# EAGLE board pyControl_breakout_1_2r1 (EAGLE 6.6.0)
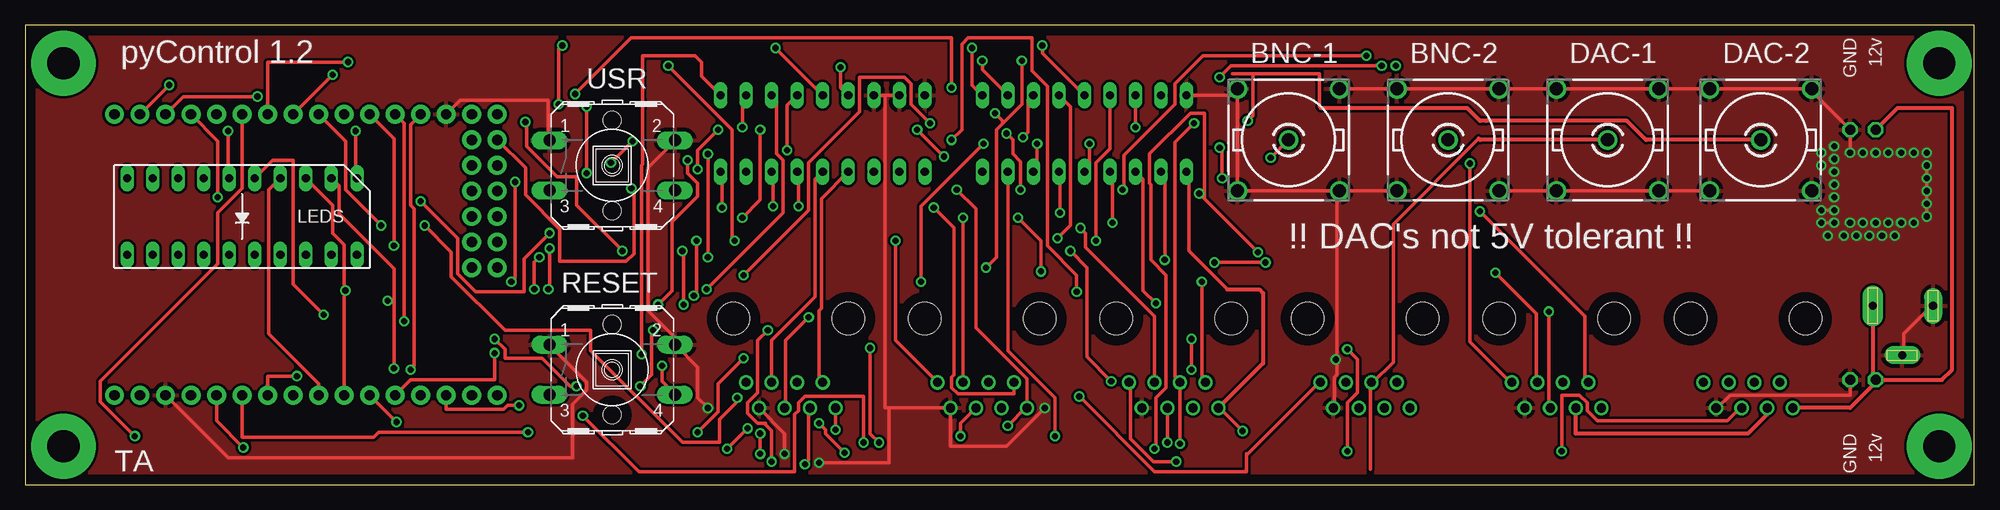
[diagram p0: board, top side]
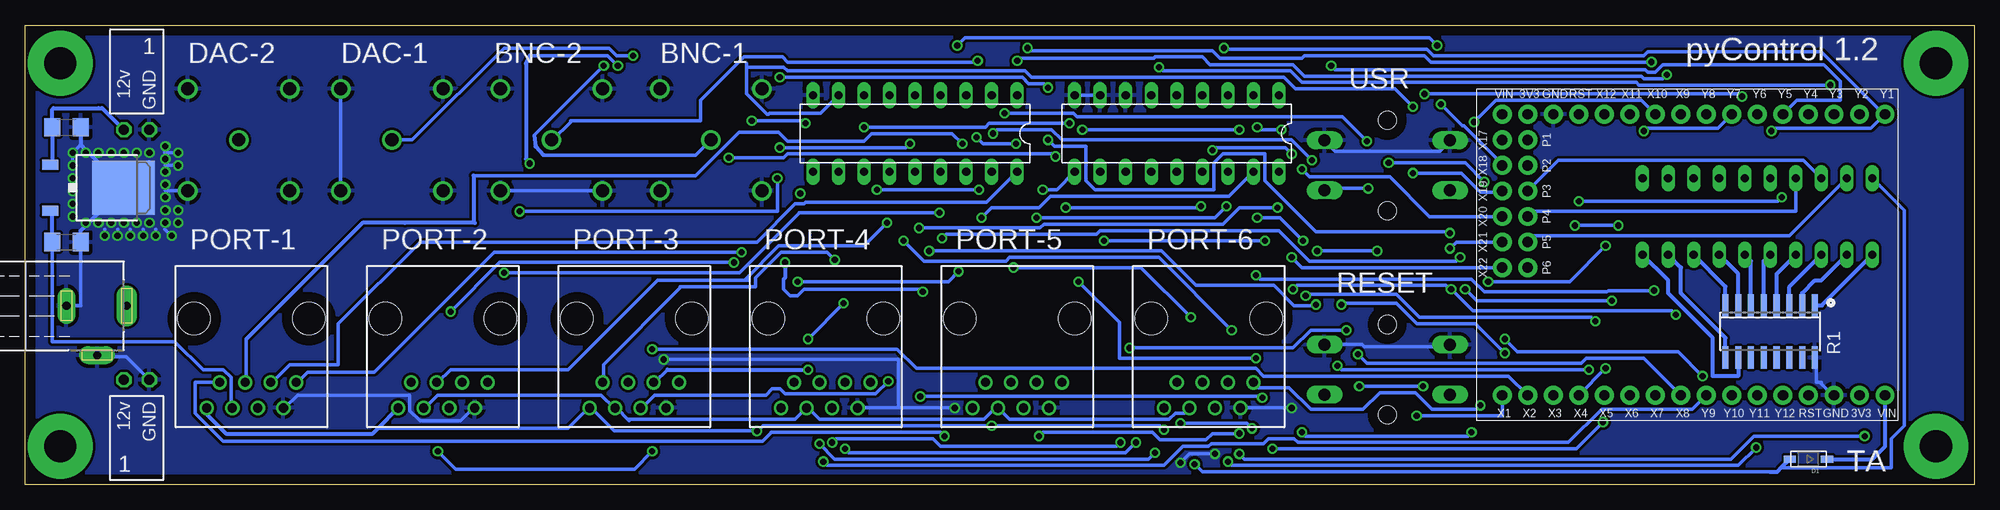
[diagram p1: board, bottom side, seen from below]

Size 193.98 x 45.71 mm. Coordinates in mm from the lower left corner, seen from the top.
Outline: 0,0 193.98,0 193.98,45.71 0,45.71 0,0
Copper layers (1*16): Top 0.035mm / dielectric 1.5mm / Bottom 0.035mm
Design rules "default *": minimum track width 14mil, minimum drill 24mil, track to track 10mil, track to pad 10mil, pad to pad 10mil, via to via 10mil, smd to smd 10mil, copper to edge 40mil, drill to drill 8mil, minimum pad ring 10mil, minimum via ring 8mil, stop-mask expansion 4mil, vias tented up to drill 0mil, thermal gap 15mil
vRestrict: area 125.7,22.9 to 177.8,26.7; area 8.9,1.3 to 12.7,3.8; area 53.3,18.4 to 64.1,21.6; area 71.1,22.9 to 82.6,26; area 90.2,22.9 to 101.6,26; area 109.2,22.9 to 120.7,26; area 121.3,41.3 to 130.8,44.5; area 137.2,41.3 to 147.3,44.5; area 153,41.3 to 162.6,44.5; area 168.3,41.3 to 177.8,44.5; area 55.2,38.7 to 62.2,41.9; area 8.9,40.6 to 29.2,45.1

## Footprints (pad centres in the part's own frame; a part is rotated, then mirrored left to right if it is on the bottom)
R141426 = drill 1.295: 1 0,0; 2 5.08,5.08; 3 -5.08,5.08; 4 -5.08,-5.08; 5 5.08,-5.08
C1206 = smd 1.6 x 1.8: 1 -1.4,0; 2 1.4,0
SOD-123 = smd 1.2 x 0.7: A 1.85,0; C -1.85,0
DIL18 = drill 0.813 long: 1 -10.16,-3.81; 2 -7.62,-3.81; 3 -5.08,-3.81; 4 -2.54,-3.81; 5 0,-3.81; 6 2.54,-3.81; 7 5.08,-3.81; 8 7.62,-3.81; 9 10.16,-3.81; 10 10.16,3.81; 11 7.62,3.81; 12 5.08,3.81; 13 2.54,3.81; 14 0,3.81; 15 -2.54,3.81; 16 -5.08,3.81; 17 -7.62,3.81; 18 -10.16,3.81
TO252 = smd 1 x 1.6: 1 -2.28,-4.8; 2 2.28,-4.8 | smd 5.4 x 6.2: 3 0,2.5
LED_BARGAPH_10 = drill 0.813 long: 1 -11.43,-3.81; 2 -8.89,-3.81; 3 -6.35,-3.81; 4 -3.81,-3.81; 5 -1.27,-3.81; 6 1.27,-3.81; 7 3.81,-3.81; 8 6.35,-3.81; 9 8.89,-3.81; 10 11.43,-3.81; 11 11.43,3.81; 12 8.89,3.81; 13 6.35,3.81; 14 3.81,3.81; 15 1.27,3.81; 16 -1.27,3.81; 17 -3.81,3.81; 18 -6.35,3.81; 19 -8.89,3.81; 20 -11.43,3.81
RJ45-NO-SHIELD-VERTICAL = drill 0.9 pad 1.4: 1 -4.445,5.08; 2 -3.175,7.62; 3 -1.905,5.08; 4 -0.635,7.62; 5 0.635,5.08; 6 1.905,7.62; 7 3.175,5.08; 8 4.445,7.62 | hole 3.251: -5.715,-1.27; 5.715,-1.27
SSW-102-02-S-S-RA = drill 1 pad 1.5 octagon: 1 -1.27,1.524; 2 1.27,1.524
NEB21R = drill 0.813 pad 2.032 long: 1 0,7.35 | drill 0.813 pad 1.778 long: 2 4.9,4.4; 3 0,1.35
PYBOARD-REDUCED-2 = drill 1.016 pad 1.88: 3V3_1 2.54,5.08; 3V3_2 30.48,38.1; GND_1 2.54,7.62; GND_6 30.48,35.56; P1 5.08,5.08; P2 7.62,5.08; P3 10.16,5.08; P4 12.7,5.08; P5 15.24,5.08; P6 17.78,5.08; RESET_1 2.54,10.16; RESET_2 30.48,33.02; VIN 2.54,2.54; VIN_5 30.48,40.64; X1 30.48,2.54; X2 30.48,5.08; X3 30.48,7.62; X4 30.48,10.16; X5 30.48,12.7; X6 30.48,15.24; X7 30.48,17.78; X8 30.48,20.32; X9 2.54,20.32; X10 2.54,17.78; X11 2.54,15.24; X12 2.54,12.7; X17 5.08,2.54; X18 7.62,2.54; X19 10.16,2.54; X20 12.7,2.54; X21 15.24,2.54; X22 17.78,2.54; Y1 2.54,40.64; Y2 2.54,38.1; Y3 2.54,35.56; Y4 2.54,33.02; Y5 2.54,30.48; Y6 2.54,27.94; Y7 2.54,25.4; Y8 2.54,22.86; Y9 30.48,22.86; Y10 30.48,25.4; Y11 30.48,27.94; Y12 30.48,30.48
SO16 = smd 0.6 x 2.2: 1 -4.445,-2.6; 2 -3.175,-2.6; 3 -1.905,-2.6; 4 -0.635,-2.6; 5 0.635,-2.6; 6 1.905,-2.6; 7 3.175,-2.6; 8 4.445,-2.6; 9 4.445,2.6; 10 3.175,2.6; 11 1.905,2.6; 12 0.635,2.6; 13 -0.635,2.6; 14 -1.905,2.6; 15 -3.175,2.6; 16 -4.445,2.6
B3F-40XX = drill 1.194 long: 1 -6.248,2.489; 2 6.248,2.489; 3 -6.248,-2.489; 4 6.248,-2.489 | hole 1.803: 0,-4.496; 0,4.496

## Placement (x,y rotation side)
BNC-1  R141426  [R141426]  125.73,34.29 0 top
BNC-2  R141426  [R141426]  141.6,34.29 0 top
C1  1uF  [C1206]  189.87,24.13 0 bottom
C2  1uF  [C1206]  189.87,35.56 0 bottom
D1  MBRA140  [SOD-123]  16.51,2.54 180 bottom
DAC-1  R141426  [R141426]  157.48,34.29 0 top
DAC-2  R141426  [R141426]  172.72,34.29 0 top
IC1  TBD62083APG  [DIL18]  105.41,34.92 180 bottom
IC2  TBD62083APG  [DIL18]  79.38,34.92 180 bottom
IC3  7805DT  [TO252]  186.69,29.53 270 bottom
LEDS  [LED_BARGAPH_10]  21.59,26.67 180 top
PORT-1  [RJ45-NO-SHIELD-VERTICAL]  171.45,15.24 180 bottom
PORT-2  [RJ45-NO-SHIELD-VERTICAL]  152.4,15.24 180 bottom
PORT-3  [RJ45-NO-SHIELD-VERTICAL]  133.35,15.24 180 bottom
PORT-4  [RJ45-NO-SHIELD-VERTICAL]  114.3,15.24 180 bottom
PORT-5  [RJ45-NO-SHIELD-VERTICAL]  95.25,15.24 180 bottom
PORT-6  [RJ45-NO-SHIELD-VERTICAL]  76.2,15.24 180 bottom
POW_BUS_1  SSW-102-02-S-S-RA  [SSW-102-02-S-S-RA]  182.88,36.83 180 bottom
POW_BUS_2  SSW-102-02-S-S-RA  [SSW-102-02-S-S-RA]  182.88,8.89 0 bottom
POW_CON  NEB21R  [NEB21R]  191.22,17.78 270 bottom
PYBOARD  PYBOARD-REDUCED-2  [PYBOARD-REDUCED-2]  49.53,39.37 270 bottom
R1  220R  [SO16]  20.32,15.24 180 bottom
RESET  [B3F-40XX]  58.42,11.43 0 top
USR  [B3F-40XX]  58.42,31.75 0 top

## Library data of the parts
BNC-1 BNC-2 DAC-1 DAC-2 = con-coax; MF: FARNELL; MPN: R141426161; OC_FARNELL: 4195115; OC_NEWARK: 14J7919
C1 C2 = resistor
D1 = adafruit
IC1 IC2 = uln-udn
IC3 = linear
LEDS = SparkFun-LED
PORT-1-PORT-6 = con-tycoelectronics-vertical_RJ45
POW_BUS_1 POW_BUS_2 = con-samtec; MPN: SSW-102-02-S-S-RA; OC_FARNELL: unknown; OC_NEWARK: 11P9352
POW_CON = con-lumberg; MPN: NEB 21 R; OC_FARNELL: 1217037; OC_NEWARK: 97K6458
PYBOARD = micropython
R1 = resistor-bourns; OC_FARNELL: unknown; OC_NEWARK: unknown
RESET USR = switch-omron; MF: OMRON COMPONENTS USA; MPN: B3F-4000; OC_FARNELL: 176434; OC_NEWARK: 36K3105

## Nets
+3V3: PYBOARD.3V3_1
+5V: C1.1 D1.A IC3.2 LEDS.10 PORT-1.6 PORT-2.6 PORT-3.6 PORT-4.6 PORT-5.6 PORT-6.6
+12V: C2.1 IC1.10 IC2.10 IC3.1 PORT-1.8 PORT-2.8 PORT-3.8 PORT-4.8 PORT-5.8 PORT-6.8 POW_BUS_1.2 POW_BUS_2.1 POW_CON.1
BNC-1: BNC-1.1 PYBOARD.X12
BTN-1: PYBOARD.X17 USR.4
DAC-1: DAC-1.1 PORT-3.5 PYBOARD.X5
DAC-2: DAC-2.1 PORT-4.5 PYBOARD.X6
DIO-1A: PORT-1.1 PYBOARD.X1
DIO-1B: PORT-1.4 PYBOARD.X2
DIO-2A: PORT-2.1 PYBOARD.Y3
DIO-2B: PORT-2.4 PYBOARD.Y4
DIO-3A: PORT-3.1 PYBOARD.X9
DIO-3B: PORT-3.4 PYBOARD.X10
DIO-4A: PORT-4.1 PYBOARD.Y9
DIO-4B: PORT-4.4 PYBOARD.Y10
DIO-5A: PORT-5.1 PYBOARD.Y5
DIO-5B: PORT-5.4 PYBOARD.Y6
DIO-6A: PORT-6.1 PYBOARD.X3
DIO-6B/BNC-2: BNC-2.1 PORT-6.4 PYBOARD.X11
GND: BNC-1.2 BNC-1.3 BNC-1.4 BNC-1.5 BNC-2.2 BNC-2.3 BNC-2.4 BNC-2.5 C1.2 C2.2 DAC-1.2 DAC-1.3 DAC-1.4 DAC-1.5 DAC-2.2 DAC-2.3 DAC-2.4 DAC-2.5 IC1.9 IC2.7 IC2.8 IC2.9 IC3.3 PORT-1.2 PORT-2.2 PORT-3.2 PORT-4.2 PORT-5.2 PORT-6.2 POW_BUS_1.1 POW_BUS_2.2 POW_CON.2 POW_CON.3 PYBOARD.GND_1 PYBOARD.GND_6 R1.16 RESET.1 RESET.2 USR.1 USR.2
GRN_LED: LEDS.7 PYBOARD.P4
N$1: LEDS.12 R1.2
N$6: LEDS.19 R1.9
N$7: LEDS.18 R1.8
N$8: LEDS.17 R1.7
N$9: LEDS.16 R1.6
N$10: LEDS.15 R1.5
N$11: LEDS.14 R1.4
N$12: LEDS.13 R1.3
N$13: LEDS.20 R1.10
N$14: LEDS.11 R1.1
N$15: D1.C PYBOARD.VIN_5
POW-1A: IC1.18 PORT-1.3
POW-1A_C: IC1.1 LEDS.1 PYBOARD.Y7
POW-1B: IC1.17 PORT-1.7
POW-1B_C: IC1.2 PYBOARD.Y8
POW-1C: IC1.16 PORT-1.5
POW-1C_C: IC1.3 PYBOARD.Y11
POW-2A: IC1.15 PORT-2.3
POW-2A_C: IC1.4 LEDS.2 PYBOARD.X4
POW-2B: IC1.14 PORT-2.7
POW-2B_C: IC1.5 PYBOARD.X18
POW-2C: IC1.13 PORT-2.5
POW-2C_C: IC1.6 PYBOARD.Y12
POW-3A: IC1.12 PORT-3.3
POW-3A_C: IC1.7 LEDS.3 PYBOARD.X7
POW-3B: IC1.11 PORT-3.7
POW-3B_C: IC1.8 PYBOARD.X19
POW-4A: IC2.18 PORT-4.3
POW-4A_C: IC2.1 LEDS.4 PYBOARD.X8
POW-4B: IC2.17 PORT-4.7
POW-4B_C: IC2.2 PYBOARD.X20
POW-5A: IC2.16 PORT-5.3
POW-5A_C: IC2.3 LEDS.5 PYBOARD.X21
POW-5B: IC2.15 PORT-5.7
POW-5B_C: IC2.4 PYBOARD.X22
POW-6A: IC2.14 PORT-6.3
POW-6A_C: IC2.5 LEDS.6 PYBOARD.Y1
POW-6B: IC2.13 PORT-6.7
POW-6B_C: IC2.6 PYBOARD.Y2
RED_LED: LEDS.9 PYBOARD.P5
RESET: PYBOARD.RESET_1 RESET.4
YEL_LED: LEDS.8 PYBOARD.P3

## Tracks (layer width: path | path; a pad name or v marks a point on that pad's centre or on a via)
+5V  (via drill 0.61)
  Top 0.356: v77.6,2.03 77.98,2.41 77.98,7.49 PORT-6.6
  Top 0.406: PORT-1.6 173.35,6.99 171.45,5.08 154.31,5.08 PORT-2.6
  Bottom 0.356: C1.1 191.26,14.22 179.07,14.22 176.28,11.43 174.24,11.43 173.48,10.67 173.48,7.62 PORT-1.6 | 133.86,6.35 133.92,6.41 | 133.92,6.41 135.13,7.62 PORT-3.6 135.38,7.62 136.65,8.89 152.91,8.89 154.18,7.62 PORT-2.6 | 133.92,6.41 133.86,6.48 117.35,6.48 PORT-4.6 116.08,7.62 114.94,6.48 98.55,6.48 97.41,7.62 PORT-5.6 96.01,6.48 80.14,6.48 79.5,7.11 78.61,7.11 PORT-6.6 | 20.32,1.27 76.83,1.27 v77.6,2.03 | LEDS.10 6.99,27.3 6.99,5.84 8.26,4.57 8.26,1.65 19.05,1.65 19.15,1.75
  Bottom 0.406: C1.1 191.26,27.02 IC3.2 | 20.32,1.27 19.63,1.27 19.15,1.75 D1.A
+12V  (via drill 0.61)
  Top 0.356: 118.62,7.62 PORT-4.8 118.87,7.62 v121.16,5.33 | IC1.10 115.82,30.86 115.82,23.24 119.63,19.43 | v92.71,29.34 94.61,27.43 94.61,15.62 99.69,10.54 PORT-5.8 99.57,7.62 v97.79,5.84 | v80.64,5.46 PORT-6.8
  Top 0.406: POW_CON.1 183.87,10.7 | 183.87,10.7 POW_BUS_2.1 190.75,10.41 191.77,11.43 191.77,37.47 186.31,37.47 POW_BUS_1.2 | 183.87,10.7 183.87,10.45 184.15,10.16 181.61,7.62 PORT-1.8 | 119.63,19.43 122.81,19.43 123.19,19.05 123.19,12.06 PORT-4.8
  Bottom 0.356: 158.81,5.65 158.75,5.59 139.95,5.59 137.92,7.62 PORT-3.8 137.67,7.62 135.38,5.33 v121.16,5.33 121.03,5.33 120.52,5.84 97.92,5.84 v97.79,5.84 81.03,5.84 v80.64,5.46 | IC2.10 91.31,29.34 v92.71,29.34
  Bottom 0.406: IC3.1 191.26,32.03 C2.1 191.26,37.34 191.13,37.47 186.69,37.47 186.31,37.47 POW_BUS_1.2 | PORT-1.8 175.9,6.99 173.99,5.08 159.38,5.08 158.81,5.65 PORT-2.8
BNC-1  (via drill 0.61)
  Top 0.356: PYBOARD.X12 37.72,35.94 v37.72,16.26 | v66.55,18.8 66.8,19.05 v66.8,24.26 | v71.37,26.54 73.15,28.32 v73.15,35.31 | v91.44,32.64 v88.77,35.31 | BNC-1.1 v123.95,32.51
  Bottom 0.356: 143.32,34.73 v136.4,41.66 | 142.37,32.77 127.25,32.77 BNC-1.1 | v37.72,16.26 38.1,16.64 55.24,16.64 57.53,18.92 66.42,18.92 v66.55,18.8 | v66.8,24.26 69.09,26.54 v71.37,26.54 | v88.77,35.31 v73.15,35.31 | v91.44,32.64 91.69,32.89 118.11,32.89 118.49,32.51 v123.95,32.51
  Bottom 0.406: 143.32,34.73 143.19,33.66 142.37,32.77
BTN-1  (via drill 0.61)
  Top 0.356: v60.33,29.46 60.58,29.21 60.58,22.99 59.82,22.23 53.21,22.23 53.21,25.4 49.78,28.83 49.78,31.5 PYBOARD.X17
  Bottom 0.356: v60.33,29.46 64.52,29.46 64.64,29.34 USR.4
DAC-1  (via drill 0.61)
  Top 0.356: 144.65,34.42 144.53,34.29 136.14,25.91 136.14,12.19 134.11,10.16 PORT-3.5 133.86,10.16 133.86,1.52 | PYBOARD.X5 38.35,10.41 46.74,10.41 v46.74,13.08 | v62.99,17.91 64.39,19.3 64.39,26.16 66.93,28.7 66.93,29.97 65.91,30.99 v65.91,32.26 | v97.66,34.92 98.3,34.29 98.3,32.89 99.06,32.13 v99.06,29.34 | v109.22,29.34 109.35,29.46 109.35,32.77 114.43,37.85 114.43,39.88 117.22,42.67 v133.48,42.67
  Top 0.406: DAC-1.1 144.78,34.29 144.65,34.42
  Bottom 0.356: v46.74,13.08 49.66,16 55.5,16 57.53,18.03 62.87,18.03 v62.99,17.91 | v65.91,32.26 67.94,34.29 90.81,34.29 91.82,35.31 97.28,35.31 v97.66,34.92 | v109.22,29.34 v99.06,29.34 | v133.48,42.67 135.13,42.67 135.89,43.43 146.3,43.43 155.45,34.29 DAC-1.1
DAC-2  (via drill 0.61)
  Top 0.356: 122.17,40.89 128.78,40.89 128.78,37.59 128.91,37.47 | 122.17,40.89 120.14,40.89 | v116.33,35.94 114.43,34.04 114.43,10.67 PORT-4.5 114.94,10.03 v114.94,4.06 | v121.67,36.2 122.17,36.7 122.17,40.77 122.17,40.89 | v36.96,6.22 PYBOARD.X6 | v71.88,5.59 v69.85,3.56 | v78.99,6.1 79.63,5.46 79.63,5.08 v81.53,3.17
  Top 0.406: DAC-2.1 161.29,34.29 160.02,35.56 159.38,36.2 145.41,36.2 144.78,36.2 143.51,37.47 128.91,37.47
  Bottom 0.356: v116.33,35.94 116.59,36.2 v121.67,36.2 | v36.96,6.22 39.62,3.56 v69.85,3.56 | v71.88,5.59 72.39,6.1 v78.99,6.1 | v81.53,3.17 82.17,2.54 113.41,2.54 v114.94,4.06
DIO-1A  (via drill 0.61)
  Top 0.356: v116.84,28.96 117.28,28.51 | 117.28,28.51 v122.68,23.11 | v55.5,6.86 61.09,1.27 76.58,1.27 76.58,6.99 76.96,7.37 76.96,8.13 77.6,8.76 83.44,8.76 v83.44,4.19 | v112.39,3.56 112.52,3.68 112.52,8.64 113.54,9.65 113.54,20.83 112.01,22.35 112.01,29.84 111.89,29.97 111.89,32.89 115.95,36.96 117.35,36.96 117.35,28.57 117.28,28.51
  Bottom 0.356: v122.68,23.11 147.32,23.11 159.26,11.18 165.86,11.18 166.88,10.16 PORT-1.1 | PYBOARD.X1 46.99,6.86 v55.5,6.86 | v83.44,4.19 84.45,3.17 112.01,3.17 v112.39,3.56
DIO-1B  (via drill 0.61)
  Top 0.356: v152.91,3.3 152.91,8.89 154.69,8.89 155.45,8.13 155.45,7.37 156.46,6.35 169.42,6.35 170.69,7.62 PORT-1.4 | v131.57,13.46 132.59,12.45 132.59,9.14 131.57,8.13 v131.57,3.3
  Bottom 0.356: v152.91,3.3 151.13,1.52 151,1.52 133.35,1.52 v131.57,3.3 | PYBOARD.X2 46.35,10.79 70.74,10.79 71.5,11.56 105.28,11.56 107.19,13.46 v131.57,13.46
DIO-2A  (via drill 0.61)
  Top 0.356: v143.76,31.94 143.76,14.22 147.83,10.16 PORT-2.1 | PYBOARD.Y3 15.75,38.61 v23.11,38.61 | v54.74,38.86 60.33,44.45 92.2,44.45 v92.2,39.5 | v118.87,40.51 120.02,41.66 v135,41.66
  Bottom 0.356: v23.11,38.61 23.37,38.86 v54.74,38.86 | v92.2,39.5 92.58,39.88 94.11,39.88 94.74,40.51 v118.87,40.51 | v135,41.66 136.02,42.67 143.64,42.67 143.76,42.67
  Bottom 0.406: 143.76,42.67 144.15,41.91 144.15,32.38 v143.76,31.94
DIO-2B  (via drill 0.61)
  Top 0.356: v151.64,17.21 151.64,7.62 PORT-2.4 | v118.36,22.1 v123.44,22.1 | PYBOARD.Y4 19.18,34.16 v19.18,28.57 | v39.37,28.19 43.05,24.51 43.05,20.95 44.83,19.18 49.66,19.18 49.66,22.48 v52.2,25.02 | v92.2,34.29 93.22,35.31 93.22,43.81 93.85,44.45 100.2,44.45 100.2,41.15 101.73,39.62 101.73,23.75 104.65,20.83 v104.65,19.18
  Bottom 0.356: v151.64,17.21 146.75,22.1 v123.44,22.1 | v19.18,28.57 19.56,28.19 v39.37,28.19 | v52.2,25.02 52.32,25.15 65.53,25.15 70.61,30.23 70.61,32.89 74.8,32.89 75.69,32 75.69,29.34 87.5,29.34 88.39,30.23 88.39,33.66 91.57,33.66 v92.2,34.29 | v104.65,19.18 104.9,19.43 116.46,19.43 117.09,18.8 117.86,18.8 118.49,19.43 118.49,20.45
  Bottom 0.406: v118.36,22.1 118.36,20.57 118.49,20.45
DIO-3A  (via drill 0.61)
  Top 0.356: PORT-3.1 128.78,10.16 121.67,3.05 121.54,3.05 121.54,1.27 112.39,1.27 v104.9,8.76 | PYBOARD.X9 31.88,34.16 31.88,29.34 v35.43,25.78 | v39.75,25.78 42.42,23.11 42.42,20.7 47.75,15.37 56.26,15.37 56.26,13.34 65.41,4.19 69.09,4.19 69.09,6.48 70.87,8.26 v70.87,8.64
  Bottom 0.356: v39.75,25.78 v35.43,25.78 | v70.87,8.64 70.99,8.76 v104.9,8.76
DIO-3B  (via drill 0.61)
  Top 0.356: v49.78,36.07 49.91,35.94 49.91,33.66 52.96,30.61 54.86,30.61 54.86,27.81 v59.44,23.24 | v65.41,23.24 65.53,23.11 v65.53,17.91 | v104.01,23.24 105.66,21.59 105.66,12.7 v108.08,10.29
  Bottom 0.356: PORT-3.4 132.59,7.62 131.32,8.89 120.4,8.89 120.27,8.89 119.63,9.53 118.87,9.53 118.36,9.02 109.35,9.02 v108.08,10.29 | PYBOARD.X10 33.15,38.23 47.62,38.23 v49.78,36.07 | v65.41,23.24 v59.44,23.24 | v65.53,17.91 65.66,17.78 67.69,17.78 69.72,19.81 77.47,19.81 80.9,23.24 v104.01,23.24
DIO-4A  (via drill 0.61)
  Top 0.356: PORT-4.1 109.98,10.03 109.98,4.57 112.27,2.29 v114.55,2.29
  Bottom 0.356: v114.55,2.29 114.17,1.91 80.64,1.91 78.74,3.81 76.2,3.81 75.95,4.06 70.74,4.06 70.23,4.57 67.69,4.57 67.31,4.19 40.39,4.19 37.08,7.49 28.07,7.49 PYBOARD.Y9
DIO-4B  (via drill 0.61)
  Top 0.356: v113.67,4.19 PORT-4.4 | v84.96,4.19 84.07,5.08 v84.07,13.59 | v62.48,15.37 62.36,15.24 62.36,10.92 v61.21,9.78 | v54.86,9.78 54.23,9.78 51.44,12.57 47.75,12.57 47.75,13.46 v46.74,14.48 | v27.05,10.79 24.13,10.79 PYBOARD.Y10
  Bottom 0.356: v113.67,4.19 113.28,4.57 103.63,4.57 102.87,3.81 85.34,3.81 v84.96,4.19 | v84.07,13.59 67.82,13.59 66.04,15.37 v62.48,15.37 | v54.86,9.78 v61.21,9.78 | v46.74,14.48 45.47,13.21 29.46,13.21 v27.05,10.79
DIO-5A  (via drill 0.61)
  Top 0.356: PORT-5.1 86.61,14.35 v86.61,24.26 | v70.61,24.26 70.36,24.51 70.36,35.31 v64.01,41.66
  Bottom 0.356: v70.61,24.26 v86.61,24.26 | v64.01,41.66 63.63,41.27 32.77,41.27 32.51,41.02 31.75,41.02 30.99,41.78 14.99,41.78 13.34,40.13 13.34,38.23 17.65,38.23 PYBOARD.Y5
DIO-5B  (via drill 0.61)
  Top 0.356: PORT-5.4 93.09,6.1 v93.09,4.83 | v73.15,3.05 v73.15,5.08 | v10.92,4.83 7.49,8.26 7.49,10.29 19.18,21.97 19.18,27.05 21.59,29.46 PYBOARD.Y6
  Bottom 0.356: v93.09,4.83 92.71,5.21 81.79,5.21 81.03,4.45 76.45,4.45 75.82,5.08 v73.15,5.08 | v73.15,3.05 72.64,2.54 24.26,2.54 21.97,4.83 v10.92,4.83
DIO-6A  (via drill 0.61)
  Top 0.356: v49.15,7.87 48.01,7.87 47.62,7.49 41.91,7.49 PYBOARD.X3
  Bottom 0.356: PORT-6.1 71.25,9.65 68.2,9.65 66.04,7.49 60.83,7.49 59.18,9.14 55.63,9.14 53.98,7.49 49.53,7.49 v49.15,7.87
DIO-6B/BNC-2  (via drill 0.61)
  Top 0.356: PORT-6.4 75.69,7.75 75.69,14.35 v77.98,16.64 | v95.63,21.59 96.65,22.61 96.65,35.31 97.35,36.01 | 97.35,36.01 99.19,37.85 v99.19,42.16 | PYBOARD.X11 36.7,34.42 v36.7,23.75 | v48.39,20.19 48.77,20.57 v48.77,30.1 | v60.45,34.16 v58.29,32 | v96.52,36.96 97.28,36.2 97.28,36.07 97.35,36.01
  Bottom 0.356: BNC-2.1 141.48,34.29 139.7,36.07 139.7,36.2 126.75,36.2 126.75,38.23 122.43,42.55 118.62,42.55 118.11,42.04 99.31,42.04 v99.19,42.16 | v77.98,16.64 82.93,21.59 v95.63,21.59 | v36.7,23.75 40.26,20.19 v48.39,20.19 | v48.77,30.1 50.67,32 v58.29,32 | v60.45,34.16 62.87,36.58 89.28,36.58 89.66,36.96 v96.52,36.96
GND  (via drill 0.61)
  Top 0.356: POW_CON.3 189.74,17.78 186.94,14.99 186.94,12.95 POW_CON.2 | POW_BUS_2.2 181.61,8.89 169.67,8.89 168.4,7.62 PORT-1.2 | BNC-1.2 136.4,39.37 BNC-2.3 136.65,39.37 146.56,39.37 BNC-2.2 146.81,39.37 DAC-1.3 DAC-1.2 DAC-2.3 167.77,39.37 177.67,39.37 DAC-2.2 177.8,39.12 POW_BUS_1.1 181.61,35.18 v181.61,33.02 | BNC-1.5 136.4,29.21 BNC-2.4 | DAC-2.4 DAC-1.5 DAC-1.4 146.81,29.21 BNC-2.5 | 130.56,29.21 BNC-1.4 BNC-1.3 120.52,38.73 IC1.9 | 130.56,29.21 BNC-1.5 | 130.56,12.45 130.56,10.92 130.3,10.67 130.3,7.62 PORT-3.2 | 130.56,12.45 130.56,29.21 | 130.56,29.21 BNC-1.5 | PYBOARD.GND_1 43.31,38.23 52.07,38.23 52.07,34.29 USR.1 | v67.94,7.62 66.93,8.64 66.93,11.68 64.77,13.84 RESET.2 64.52,13.97 64.52,14.73 61.98,17.27 61.98,31.5 64.64,34.16 USR.2 | PYBOARD.GND_6 20.19,2.67 54.48,2.67 54.48,8 55.88,9.4 55.88,10.16 52.2,13.84 RESET.1 | IC2.8 85.6,38.73 | 85.6,38.73 IC2.7 | 85.98,7.62 85.6,7.62 85.6,38.61 85.6,38.73 | 85.98,7.62 PORT-5.2 92.08,7.49 92.08,3.81 97.66,3.81 v101.47,7.62 | v189.23,26.67 v189.23,27.94 189.23,28.07 v189.23,29.21 189.23,29.34 v189.23,30.48 189.23,30.61 v189.23,31.75 | v178.75,26.04 178.82,26.04 179.96,26.04 v180.02,26.04 | v178.75,27.3 178.82,27.3 179.96,27.3 v180.02,27.3 | v130.43,12.45 130.56,12.45 | PORT-6.2 75.56,5.08 v75.56,3.05 | v78.99,2.16 85.98,2.16 85.98,7.49 85.98,7.62
  Bottom 0.356: PORT-2.2 149.35,7.62 150.62,6.35 154.69,6.35 155.7,7.37 155.7,8.89 166.88,8.89 168.15,7.62 PORT-1.2 | POW_BUS_2.2 183.9,12.7 186.69,12.7 POW_CON.2 | C1.2 188.47,17.78 189.74,17.78 POW_CON.3 | BNC-2.4 136.65,29.21 146.56,29.21 BNC-2.5 | DAC-1.5 DAC-1.2 | R1.16 15.75,12.45 15.75,10.16 15.24,10.16 15.24,10.03 14.1,8.89 PYBOARD.GND_6 | USR.1 52.2,34.16 53.21,33.15 63.63,33.15 64.64,34.16 USR.2 | v67.94,7.62 PORT-6.2 | RESET.1 52.2,13.84 52.32,13.72 60.71,13.72 60.96,13.97 64.64,13.97 RESET.2 | IC2.8 IC2.9 | v101.47,7.62 107.06,7.62 | 107.06,7.62 PORT-4.2 | 180.09,33.02 180.09,33.66 v180.02,33.66 | v178.75,31.75 178.82,31.75 179.96,31.75 180.02,31.75 | v178.75,33.02 178.82,33.02 179.96,33.02 180.02,33.02 | 180.09,25.4 179.45,24.77 v179.39,24.77 | 180.97,25.4 v180.97,24.77 | 182.25,25.4 v182.25,24.77 | 183.51,25.4 v183.51,24.77 | 184.78,25.4 v184.78,24.77 | 186.06,25.4 v186.06,24.77 | 188.46,33.79 188.59,33.66 v189.23,33.02 189.23,32.89 v189.23,31.75 | DAC-2.5 179.96,29.21 180.02,29.21 | v130.43,12.45 107.06,12.45 107.06,7.75 107.06,7.62 | v75.56,3.05 78.11,3.05 v78.99,2.16
  Bottom 0.406: C2.2 188.47,33.8 188.46,33.79 IC3.3 | 181.61,32.11 IC3.3 | C1.2 188.47,25.25 | 188.47,25.25 IC3.3 | 188.47,25.25 IC3.3
  other vias: 180.02,32.38 180.02,31.11 180.02,29.84 182.88,33.02 185.42,33.02 185.42,26.04 184.15,33.02 186.69,33.02 187.96,33.02 184.15,26.04 186.69,26.04 187.96,26.04 182.88,26.04 181.61,26.04 180.02,28.57
  pour Top: 0,0 0,45.72 194.31,45.72 194.31,0
  pour Bottom: 0,0 0,45.72 194.31,45.72 194.31,0
  pour Bottom (no thermals): 187.96,33.02 180.02,33.02 180.02,25.4 187.96,25.4
GRN_LED
  Bottom 0.356: LEDS.7 17.78,27.18 43.94,27.18 PYBOARD.P4
N$1
  Bottom 0.406: R1.2 17.14,18.41 17.14,19.05 15.88,20.32 15.24,20.32 LEDS.12
N$2  (via drill 3.2 pad 6.45)
  other vias: 190.5,41.91
N$3  (via drill 3.2 pad 6.45)
  other vias: 190.5,3.81
N$4  (via drill 3.2 pad 6.45)
  other vias: 3.81,3.81
N$5  (via drill 3.2 pad 6.45)
  other vias: 3.81,41.91
N$6
  Bottom 0.406: R1.9 24.77,14.61 29.21,19.05 29.21,21.59 LEDS.19
N$7
  Bottom 0.406: R1.8 24.77,19.68 LEDS.18
N$8
  Bottom 0.406: R1.7 23.5,20.95 LEDS.17
N$9
  Bottom 0.406: R1.6 22.23,22.23 LEDS.16
N$10
  Bottom 0.406: R1.5 20.95,22.23 LEDS.15
N$11
  Bottom 0.406: R1.4 19.68,20.95 LEDS.14
N$12
  Bottom 0.406: R1.3 18.41,19.68 LEDS.13
N$13
  Bottom 0.406: R1.10 23.5,10.79 26.04,10.79 26.04,14.61 30.48,19.05 30.48,20.32 LEDS.20
N$14
  Bottom 0.406: R1.1 15.18,17.84 LEDS.11
N$15
  Bottom 0.406: D1.C 10.16,2.54 8.89,3.81 PYBOARD.VIN_5
POW-1A
  Bottom 0.356: PORT-1.3 169.42,10.16 167.64,11.94 162.81,11.94 162.81,16 154.69,24.13 121.16,24.13 117.35,27.94 117.22,27.94 116.46,27.94 116.33,28.07 98.3,28.07 IC1.18
POW-1A_C  (via drill 0.61)
  Top 0.356: LEDS.1 32.89,30.61 v32.89,35.18 | IC1.1 94.23,39.75 v94.23,43.43 | v32.13,42.04 24.13,42.04 PYBOARD.Y7
  Bottom 0.356: v32.89,35.18 32.64,35.43 25.53,35.43 PYBOARD.Y7 | v94.23,43.43 93.98,43.18 75.82,43.18 75.06,42.42 66.93,42.42 66.67,42.67 54.74,42.67 54.1,42.04 v32.13,42.04
POW-1B  (via drill 0.61)
  Top 0.356: IC1.17 97.79,13.34 102.49,8.64 v102.49,4.83
  Bottom 0.356: PORT-1.7 174.75,10.16 177.04,10.16 177.04,7.11 174.24,4.32 120.59,4.32 119.83,5.08 119.76,5.21 102.87,5.21 v102.49,4.83
POW-1B_C  (via drill 0.61)
  Top 0.356: IC1.2 95.25,41.27 v95.25,42.16 | PYBOARD.Y8 v30.61,40.77
  Bottom 0.356: v95.25,42.16 95,42.42 81.66,42.42 81.53,42.55 76.83,42.55 76.07,41.78 67.82,41.78 66.67,40.64 33.15,40.64 32.89,40.39 30.99,40.39 v30.61,40.77
POW-1C  (via drill 0.61)
  Top 0.356: IC1.16 100.71,31.5 v100.71,33.91
  Bottom 0.356: 149.35,30.73 127.25,30.73 122.94,35.05 122.81,35.05 119,35.05 118.11,34.16 110.49,34.16 109.73,34.92 101.73,34.92 v100.71,33.91 | 171.96,14.48 171.96,10.16 PORT-1.5
  Bottom 0.406: 149.35,30.73 149.35,26.16 149.22,26.04 156.21,26.04 160.4,26.04 171.96,14.48
POW-1C_C  (via drill 0.61)
  Top 0.356: IC1.3 99.82,38.23 99.82,35.05 v99.31,34.54 | v95.38,33.91 89.15,27.69 v89.15,20.19 | v71.5,12.57 68.96,10.03 68.96,7.24 v66.93,5.21 | v50.04,5.21 35.18,5.21 34.67,4.7 21.59,4.7 PYBOARD.Y11
  Bottom 0.356: v99.31,34.54 98.68,33.91 v95.38,33.91 | v89.15,20.19 85.09,16.13 85.09,12.57 v71.5,12.57 | v66.93,5.21 66.55,4.83 50.42,4.83 v50.04,5.21
POW-2A  (via drill 0.61)
  Top 0.356: v146.3,21.08 150.37,17.02 150.37,10.16 PORT-2.3 | IC1.15 103,30.99 v103,27.05
  Bottom 0.356: v146.3,21.08 122.87,21.08 117.03,26.92 116.97,27.05 v103,27.05
POW-2A_C  (via drill 0.61)
  Top 0.356: LEDS.2 31.24,29.72 31.24,26.92 36.7,21.46 36.7,18.29 | v36.7,11.56 36.7,18.29 | IC1.4 104.01,37.59 104.01,25.78 v102.74,24.51 | v51.18,22.61 50.67,22.1 v50.67,19.43 | v36.07,18.29 36.58,18.29 36.7,18.29
  Bottom 0.356: PYBOARD.X4 v36.7,11.56 | v102.74,24.51 102.36,24.89 87.38,24.89 87,25.27 69.22,25.27 66.17,22.23 51.56,22.23 v51.18,22.61 | v50.67,19.43 49.53,18.29 v36.07,18.29
POW-2B  (via drill 0.61)
  Top 0.356: v144.78,27.18 155.19,16.76 155.19,10.41 155.45,10.16 PORT-2.7 | IC1.14 105.92,31.62 v105.92,33.91 | v118.87,33.53 119.13,33.27 v119.13,30.48
  Bottom 0.356: v144.78,27.18 119.13,27.18 119.13,30.35 v119.13,30.48 | v105.92,33.91 106.3,33.53 v118.87,33.53
POW-2B_C  (via drill 0.61)
  Top 0.356: IC1.5 101.22,42.93 v101.22,43.69 | v53.47,43.69 53.09,43.31 v53.09,37.85
  Bottom 0.356: v101.22,43.69 100.46,44.45 54.23,44.45 v53.47,43.69 | v53.09,37.85 50.93,35.69 50.8,35.69 46.99,31.88 PYBOARD.X18
POW-2C  (via drill 0.61)
  Top 0.356: IC1.13 108.2,30.86 v108.2,26.04
  Bottom 0.356: 122.3,20.32 131.06,20.32 139.95,11.43 151.64,11.43 152.91,10.16 PORT-2.5 | 122.3,20.32 121.92,20.32 | v108.2,26.04 110.49,23.75 119,23.75 122.3,20.45 122.3,20.32
POW-2C_C  (via drill 0.61)
  Top 0.356: IC1.6 107.95,33.4 106.55,32 v106.55,24.26 | v73.91,15.37 72.9,14.35 72.9,9.14 71.88,8.13 71.88,7.11 72.9,6.1 73.66,6.1 73.66,5.97 74.3,5.33 v74.3,2.29 | v21.72,3.68 19.05,6.35 PYBOARD.Y12
  Bottom 0.356: v106.55,24.26 104.52,22.23 96.39,22.23 96.01,22.61 81.15,22.61 v73.91,15.37 | v74.3,2.29 73.91,1.91 23.5,1.91 v21.72,3.68
POW-3A  (via drill 0.61)
  Top 0.356: IC1.12 111.25,30.35 111.25,19.3 v112.52,18.03 | v116.08,11.43 v116.08,14.48
  Bottom 0.356: 130.05,11.43 131.32,10.16 PORT-3.3 | v116.08,14.48 v112.52,18.03 | 116.2,11.3 v116.08,11.43
  Bottom 0.406: 130.05,11.43 v116.08,11.43
POW-3A_C  (via drill 0.61)
  Top 0.356: LEDS.3 30.61,27.81 30.61,25.02 31.75,23.88 31.75,19.3 | PYBOARD.X7 31.75,19.3 | v110.49,35.56 IC1.7 | v90.04,35.94 88.14,37.85 88.14,39.88 87.5,40.51 83.06,40.51 83.06,37.08 77.98,32 77.98,27.3 v71.5,20.83 | v31.88,19.3 31.75,19.3
  Bottom 0.356: v110.49,35.56 98.42,35.56 98.04,35.94 v90.04,35.94 | v71.5,20.83 71.12,20.45 50.04,20.45 48.77,19.18 36.58,19.18 36.45,19.3 v31.88,19.3
POW-3B  (via drill 0.61)
  Top 0.356: IC1.11 113.41,30.73 v113.41,22.35
  Bottom 0.356: PORT-3.7 136.4,10.16 136.4,11.94 128.78,19.56 128.78,19.68 121.28,19.68 121.28,20.57 118.75,23.11 114.17,23.11 v113.41,22.35
POW-3B_C  (via drill 0.61)
  Top 0.356: v55.88,37.59 v55.88,30.99
  Bottom 0.356: 122.17,41.91 122.17,41.53 | 122.17,41.53 122.17,38.86 120.14,36.83 120.02,36.83 119.89,36.96 114.81,36.96 IC1.8 | PYBOARD.X19 47.12,29.08 49.15,29.08 51.05,30.99 v55.88,30.99 | v55.88,37.59 57.66,39.37 67.56,39.37 68.71,40.51 93.85,40.51 94.49,41.15 118.11,41.15 118.49,41.53 122.05,41.53 122.17,41.53
POW-4A  (via drill 0.61)
  Top 0.356: IC2.18 69.34,30.99 v69.34,27.56 | v105.03,25.53 105.54,25.02 105.54,23.62 112.39,16.76 PORT-4.3
  Bottom 0.356: v69.34,27.56 73.15,27.56 74.8,25.91 92.58,25.91 92.96,25.53 v105.03,25.53
POW-4A_C  (via drill 0.61)
  Top 0.356: LEDS.4 24.26,29.34 24.26,14.99 29.21,10.03 PYBOARD.X8 | IC2.1 67.31,40.64 67.31,42.04 66.67,42.67 61.47,42.67 61.47,31.88 61.34,31.75 v61.34,12.95
  Bottom 0.356: v61.34,12.95 60.45,12.06 39.12,12.06 38.61,12.57 32.89,12.57 PYBOARD.X8
POW-4B  (via drill 0.61)
  Top 0.356: v117.09,20.19 117.09,10.41 117.35,10.16 PORT-4.7 | v98.81,26.54 101.09,24.26 v101.09,21.21
  Bottom 0.356: IC2.17 74.17,28.7 91.95,28.7 93.09,27.56 97.79,27.56 v98.81,26.54 | v101.09,21.21 102.11,20.19 v117.09,20.19
POW-4B_C  (via drill 0.61)
  Top 0.356: IC2.2 71.37,38.35 v71.37,35.56 | v68.96,35.31 66.93,33.27 v66.93,31.37
  Bottom 0.356: v71.37,35.56 71.12,35.31 v68.96,35.31 | v66.93,31.37 66.17,30.61 58.17,30.61 54.23,26.67 PYBOARD.X20
POW-5A  (via drill 0.61)
  Top 0.356: IC2.16 74.42,30.99 v74.42,27.69 | PORT-5.3 v93.34,26.54
  Bottom 0.356: v74.42,27.69 75.56,26.54 v93.34,26.54
POW-5A_C  (via drill 0.61)
  Top 0.356: LEDS.5 24.64,32.26 26.67,32.26 26.67,19.94 v29.72,16.89 | v52.07,19.43 52.2,19.56 v52.2,23.5 | IC2.3 74.8,38.23 74.8,32.89 75.44,32.26 75.44,27.05 v67.82,19.43
  Bottom 0.356: v29.72,16.89 30.1,17.27 49.91,17.27 v52.07,19.43 52.2,19.43 52.58,19.81 67.44,19.81 v67.82,19.43 | v52.2,23.5 51.56,24.13 PYBOARD.X21
POW-5B  (via drill 0.61)
  Top 0.356: IC2.15 76.96,30.99 v76.96,27.69 | v90.42,27.56 92.46,25.53 92.46,10.92 92.2,10.67 92.2,9.65 92.84,9.02 98.42,9.02 PORT-5.7
  Bottom 0.356: v76.96,27.69 77.09,27.56 v90.42,27.56
POW-5B_C  (via drill 0.61)
  Top 0.356: IC2.4 75.82,37.72 v75.82,33.27 | v67.94,22.61 v67.94,32.89
  Bottom 0.356: v75.82,33.27 75.56,33.53 68.58,33.53 v67.94,32.89 | v67.94,22.61 66.93,21.59 PYBOARD.X22
POW-6A
  Top 0.356: IC2.14 78.61,30.35 78.61,18.67 74.3,14.35 PORT-6.3
POW-6A_C  (via drill 0.61)
  Top 0.356: LEDS.6 20.19,30.61 v20.19,35.18 | v74.68,43.43 IC2.5
  Bottom 0.356: v20.19,35.18 19.94,35.43 10.29,35.43 PYBOARD.Y1 9.02,36.83 15.24,43.05 32.51,43.05 32.89,42.67 53.85,42.67 54.48,43.31 74.55,43.31 v74.68,43.43
POW-6B
  Top 0.356: IC2.13 79.25,28.45 79.25,17.53 78.99,17.27 78.99,10.54 PORT-6.7
POW-6B_C  (via drill 0.61)
  Top 0.356: IC2.6 81.15,39.5 v81.15,41.53 | PYBOARD.Y2 v14.35,39.75
  Bottom 0.356: v81.15,41.53 80.77,41.15 68.07,41.15 66.93,40.01 33.66,40.01 33.4,39.75 v14.35,39.75
RED_LED
  Bottom 0.356: LEDS.9 18.41,24.77 43.81,24.77 PYBOARD.P5
RESET  (via drill 0.61)
  Top 0.356: v63.37,11.81 63.37,10.29 64.64,9.02 RESET.4 | v38.35,11.43 38.73,11.81 38.73,27.43 38.35,27.81 38.35,35.81 PYBOARD.RESET_1
  Bottom 0.356: v63.37,11.81 62.99,11.43 v38.35,11.43
YEL_LED
  Bottom 0.356: LEDS.8 17.02,32.26 41.4,32.26 PYBOARD.P3

## Text on the board
tPlace: GND | 12v | pyControl 1.2 | !! DAC's not 5V tolerant !! | GND | 12v | TA
bPlace: pyControl 1.2 | GND | 12v | GND | 12v | TA
bNames: BNC-1 | BNC-2 | DAC-1 | DAC-2 | USR | RESET
Document: Licensed under the TAPR Open Hardware License / (www.tapr.org/OHL) / Copyright 2018 Thomas Akam